# Altium PCB DoorController.PcbDoc
Units mm, origin at the board's own origin, x right, y up, seen from the top; angles counter-clockwise.
Board outline 108.71 x 68.07 mm, 2 copper layers (Top Layer, Bottom Layer); 80 components, 62 nets, 265 pads, 0 vias.
Unrouted connection lines stored in the file: 81.
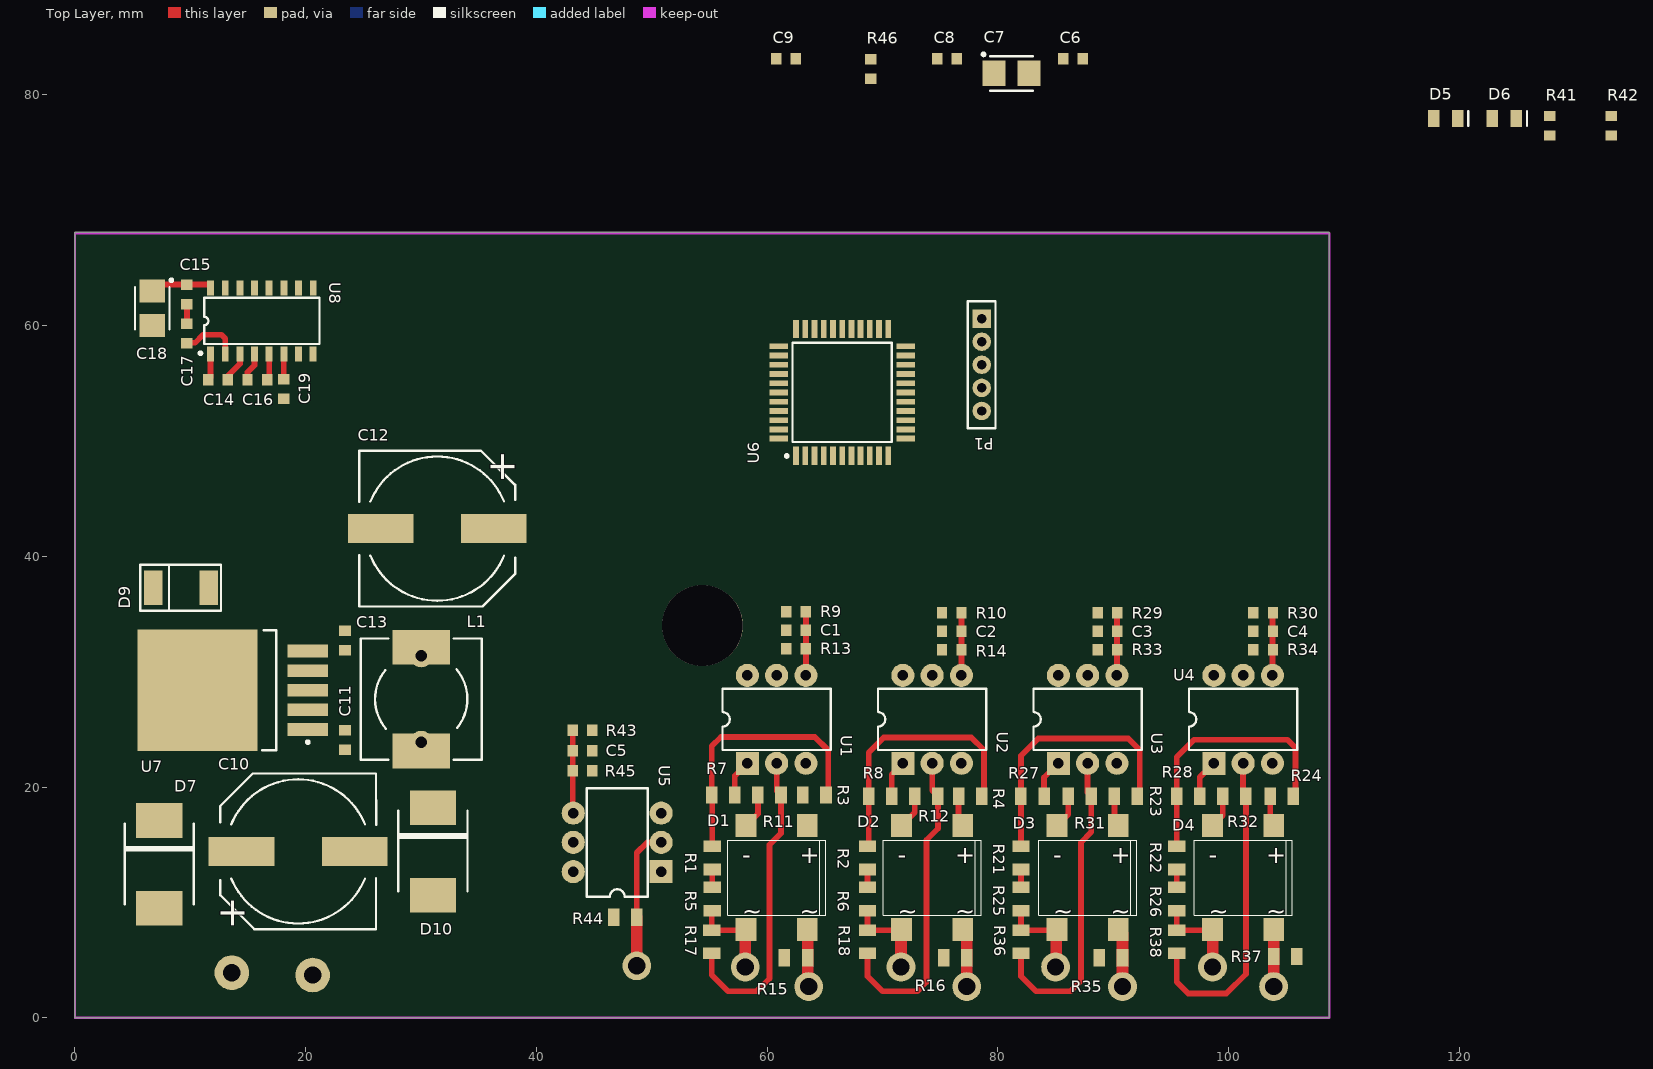
[diagram p0: Top Layer view]
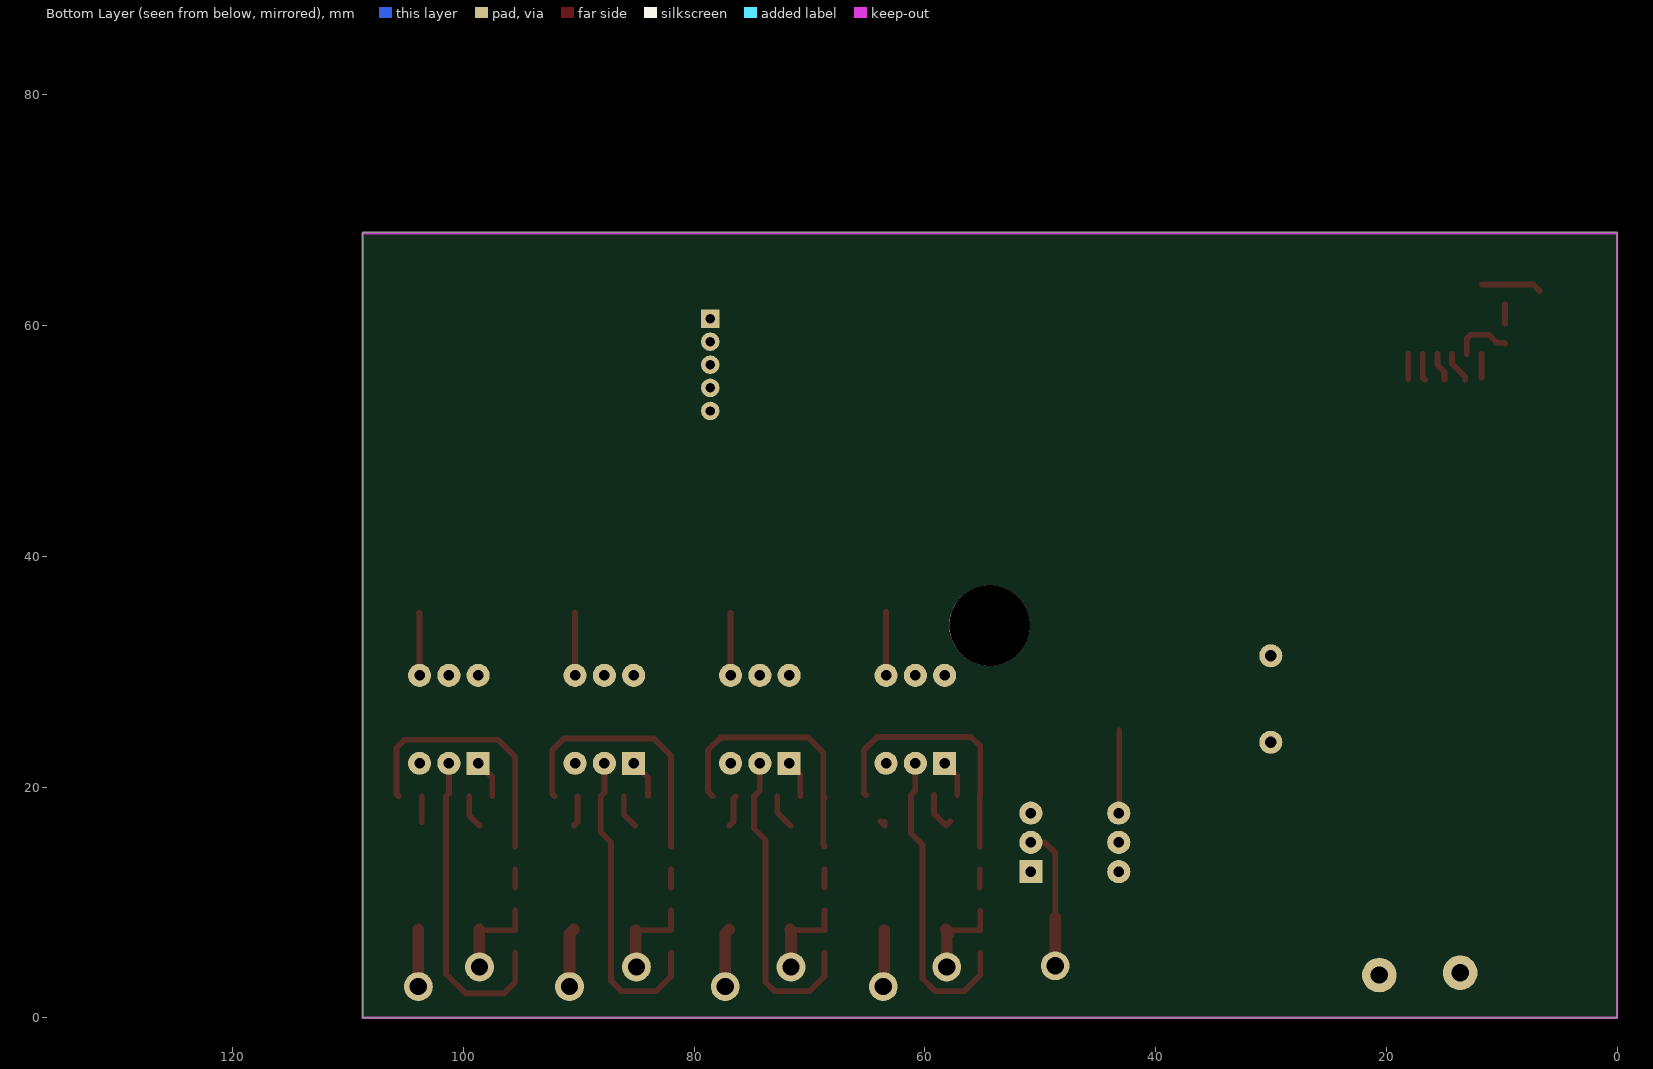
[diagram p1: Bottom Layer view, seen from below]

## Layer stack, top to bottom
Top Layer: signal copper 0.0356
Dielectric: dielectric 0.32, FR-4, Dk 4.8
Bottom Layer: signal copper 0.0356

## Board outline
0,0 108.712,0 108.712,68.072 0,68.072

## Design rules (kind name [scope] priority, off if disabled: settings)
Clearance [All] p1: gap=0.3
PolygonConnect [All] p1: connectstyle=Relief reliefconductorwidth=0.254 reliefentries=4 polygonreliefangle="90 Angle"
RoutingVias [All] p1: holewidth=0.6 width=0.8 viastyle="Through Hole" minholewidth=0.711 minwidth=1.27 maxholewidth=0.711 maxwidth=1.27
SilkscreenOverComponentPads [All] p1: minsilkscreentomaskgap=0.254
SolderMaskExpansion [All] p1: expansion=0.102
TestPointUsage [All] p1: valid=0 allowmultiple=FALSE
Testpoint [All] p1: side=15 testpointundercomponent=TRUE minsize=1.016 maxsize=2.54 preferedsize=1.524 minholesize=0 maxholesize=1.016 preferedholesize=0.813 testpointgrid=0.025 style=1023 order=0123456789
Width [All] p1: maxlimit=1.5 minlimit=0.3 preferedwidth=0.4
23 further rules are at their usual default settings.

## Classes and differential pairs
component class USART: C14 C15 C16 C17 C18 C19 U8
component class POWER: C10 C11 C12 C13 D7 D9 D10 L1 U7
component class Main: C6 C7 C8 C9 P1 R46 U6
component class IO: C1 C2 C3 C4 C5 D1 D2 D3 D4 D5 D6 R1 R2 R3 R4 R5 R6 R7 R8 R9 R10 R11 R12 R13 R14 R15 R16 R17 R18 R21 R22 R23 R24 R25 R26 R27 R28 R29 R30 R31 R32 R33 R34 R35 R36 R37 R38 R41 R42 R43 R44 R45 U1 U2 U3 U4 U5

## Components (designator, comment, footprint, x,y, rotation, side; value= is the part's Value field where it differs from the comment)
C1 "Cap" 3-0603_L 62.5,33.6 r180 top
C2 "Cap" 3-0603_L 76,33.5 r180 top
C3 "Cap" 3-0603_L 89.5,33.5 r180 top
C4 "Cap" 3-0603_L 103,33.5 r180 top
C5 "Cap" 3-0603_L 44,23.15 r0 top
C6 "Cap" 3-0603_L 86.515,83.127 r0 top
C7 "CAP-Tantal" 3528 81.181,81.857 r0 top
C8 "Cap" 3-0603_L 75.593,83.127 r0 top
C9 "Cap" 3-0603_L 61.623,83.127 r0 top
C10 "Cap Pol1" "CAP Size H13= 12.5x13.8mm" 19.342,14.417 r90 top
C11 "Cap" 3-0603_L 23.406,24.069 r90 top
C12 "Cap Pol1" "CAP Size H13= 12.5x13.8mm" 31.4,42.4 r270 top
C13 "Cap" 3-0603_L 23.406,32.705 r90 top
C14 "Cap" 3-0603_L 12.4,55.3 r0 top
C15 "Cap" 3-0603_L 9.7,62.7 r90 top
C16 "Cap" 3-0603_L 15.8,55.3 r0 top
C17 "Cap" 3-0603_L 9.7,59.3 r270 top
C18 "CAP-Tantal" 3528 6.7,61.5 r270 top
C19 "Cap" 3-0603_L 18.1,54.5 r90 top
D1 "DI1010S" DF-S 60.821,12.149 r0 top
D2 "DI1010S" DF-S 74.3,12.149 r0 top
D3 "DI1010S" DF-S 87.779,12.149 r0 top
D4 "DI1010S" DF-S 101.258,12.149 r0 top
D5 "LED Kırmızı" "6-0805 - LED" 118.816,77.955 r0 top
D6 "LED Yesil" "6-0805 - LED" 123.896,77.955 r0 top
D7 "MBRS340T3G" "CASE 403-03 ISSUE E" 7.3,13.3 r90 top
D9 "TVS SMAJ48CA" "DO214 AA" 9.182,37.277 r180 top
D10 "MBRS340T3G" "CASE 403-03 ISSUE E" 31.026,14.417 r90 top
L1 "Inductor" EB-221M18G01 30.01,27.625 r180 top
P1 "Header 2mm 5pin" "Header 2mm 5Pin" 78.6,60.6 r270 top
R1 "Res1" 6-0805_M 55.233,13.849 r270 top
R2 "Res1" 6-0805_M 68.7,13.849 r270 top
R3 "Res1" 6-0805_M 64.1,19.3 r180 top
R4 "Res1" 6-0805_M 77.6,19.2 r180 top
R5 "Res1" 6-0805_M 55.233,10.293 r90 top
R6 "Res1" 6-0805_M 68.7,10.293 r90 top
R7 "Res1" 6-0805_M 56.2,19.3 r0 top
R8 "Res1" 6-0805_M 69.8,19.2 r0 top
R9 "Res1" 3-0603_L 62.5,35.2 r180 top
R10 "Res1" 3-0603_L 76,35.1 r180 top
R11 "Res1" 6-0805_M 60.2,19.3 r180 top
R12 "Res1" 6-0805_M 73.8,19.2 r180 top
R13 "Res1" 3-0603_L 62.5,32 r0 top
R14 "Res1" 3-0603_L 76,31.9 r0 top
R15 "Res1" 6-0805_M 62.5,5.2 r0 top
R16 "Res1" 6-0805_M 76.3,5.2 r0 top
R17 "Res1" 6-0805_M 55.2,6.6 r90 top
R18 "Res1" 6-0805_M 68.7,6.6 r90 top
R21 "Res1" 6-0805_M 82,13.849 r270 top
R22 "Res1" 6-0805_M 95.5,13.849 r270 top
R23 "Res1" 6-0805_M 91.1,19.2 r180 top
R24 "Res1" 6-0805_M 104.6,19.2 r180 top
R25 "Res1" 6-0805_M 82,10.293 r90 top
R26 "Res1" 6-0805_M 95.5,10.293 r90 top
R27 "Res1" 6-0805_M 83,19.2 r0 top
R28 "Res1" 6-0805_M 96.5,19.2 r0 top
R29 "Res1" 3-0603_L 89.5,35.1 r180 top
R30 "Res1" 3-0603_L 103,35.1 r180 top
R31 "Res1" 6-0805_M 87.1,19.2 r180 top
R32 "Res1" 6-0805_M 100.5,19.2 r180 top
R33 "Res1" 3-0603_L 89.5,31.9 r0 top
R34 "Res1" 3-0603_L 103,31.9 r0 top
R35 "Res1" 6-0805_M 89.8,5.2 r0 top
R36 "Res1" 6-0805_M 82,6.6 r90 top
R37 "Res1" 6-0805_M 104.9,5.3 r180 top
R38 "Res1" 6-0805_M 95.5,6.6 r90 top
R41 "Res1" 3-0603_L 127.833,77.32 r90 top
R42 "Res1" 3-0603_L 133.167,77.32 r90 top
R43 "Res1" 3-0603_L 44,24.9 r0 top
R44 "Res1" 6-0805_M 47.7,8.7 r0 top
R45 "Res1" 3-0603_L 44,21.4 r180 top
R46 "Res1" 3-0603_L 68.989,82.238 r90 top
U1 "4N25" DIP-6 60.821,25.865 r0 top
U2 "4N25" DIP-6 74.3,25.865 r0 top
U3 "4N25" DIP-6 87.779,25.865 r0 top
U4 "4N25" DIP-6 101.258,25.865 r0 top
U5 "4N25" DIP-6 47,15.2 r90 top
U6 "PIC16F887" TQFP-44 66.5,54.2 r90 top
U7 "LM2576S-5.0" TS5B_M 14.135,28.387 r180 top
U8 "MAX232ID" "SOIC16 - big" 16.2,60.4 r0 top

## Footprints (in the part's own frame and the unit in brackets; to place one, negate y for a bottom-side part, rotate by r counter-clockwise, add the part's x,y. Pads: shape width x height; smd on the part's side, far side on the other; paste and mask are expansions set on the pad)
3-0603_L [mm] "Chip Resistor; Body 1.6 x 0.9 mm (LxW typ)"
  rect 0.9x1 smd: 1(-0.85,0) 2(0.85,0)
  body extent -0.81,-0.41 0.81,0.41, height 0.46
"6-0805 - LED" [mm] "Chip LED"
  rect 1x1.5 smd: 1(-1.05,0) 2(1.05,0)
  silkscreen extent 1.96,-0.64 1.96,0.62, body extent -1.03,-0.45 1.03,0.46, height 0.85
6-0805_M [mm] "Chip Resistor; Body 2 x 1.2 mm (LxW typ)"
  rect 1x1.5 smd: 1(-1,0) 2(1,0)
  body extent -1.01,-0.63 1.01,0.64, height 0.61
3528 [mm] "Capacitor, SM Tantalum; Body 3.5 x 2.8 mm (LxW typ)"
  rect 2x2.2 smd: 1(-1.5,0) 2(1.5,0)
  silkscreen extent -2.55,-1.5 1.85,1.77, body extent -2.5,-1.5 2.5,1.5, height 2.11
"CAP Size H13= 12.5x13.8mm" [mm]
  rect 2.5x5.7 smd: 1(0,4.9) 2(0,-4.9)
  silkscreen extent -6.75,-6.76 6.75,6.75, body extent -6.75,-6.76 6.75,7.04, height 13.5
"CASE 403-03 ISSUE E" [mm] "CASE 403-03 ISSUE E"
  rect 3x4 smd: 1(-3.8,0) 2(3.8,0)
  silkscreen extent -3.48,-3 3.53,3, body extent -4.06,-3.14 4.06,3.16, height 2.67
DF-S [mm]
  rect 1.8x2 smd: 1(-2.65,4.5) 2(-2.65,-4.5) 3(2.65,4.5) 4(2.65,-4.5)
  silkscreen extent -4.25,-3.25 4.25,3.25, body extent -4.24,-5.02 4.26,4.98, height 3.63
DIP-6 [mm] "DIP; 6 Leads; Row Spacing 7.62 mm; Pitch 2.54 mm"
  rect 2x2 hole 0.9: 1(-2.54,-3.81)
  round 2 hole 0.9 unplated: 2(0,-3.81) 3(2.54,-3.81) 4(2.54,3.81) 5(0,3.81)
  round 2 hole 0.9: 6(-2.54,3.81)
  silkscreen extent -4.7,-2.65 4.7,2.65
"DO214 AA" [mm] "DO-214-AA/SMB; 2 C-Bend Leads; Body 5.6 x 3.9 mm, inc. leads (LxW)"
  rect 1.6x3 smd: 1(-2.4,0) 2(2.4,0)
  silkscreen extent -3.48,-2 3.53,2, body extent -2.76,-1.95 2.82,2, height 2.65
EB-221M18G01 [mm]
  rect 5x3 smd: 1(0,4.5) 2(0,-4.5)
  round 2 hole 1: 1(0,3.75) 2(0,-3.75)
  silkscreen extent -5.25,-5.25 5.25,5.25, body extent -5,-5.02 5,4.98, height 4.7
"Header 2mm 5Pin" [mm] "10 pin header"
  rect 1.6x1.6 hole 0.8: 1(0,0)
  round 1.6 hole 0.8: 2(2,0) 3(4,0) 4(6,0) 5(8,0)
  silkscreen extent -1.5,-1.2 9.5,1.2
"SOIC16 - big" [mm]
  rect 0.6x1.3 smd: 1(-4.445,-2.875) 2(-3.175,-2.875) 3(-1.905,-2.875) 4(-0.635,-2.875) 5(0.635,-2.875) 6(1.905,-2.875) 7(3.175,-2.875) 8(4.445,-2.875) 9(4.45,2.875) 10(3.175,2.875) 11(1.905,2.875) 12(0.635,2.875) 13(-0.635,2.875) 14(-1.905,2.875) 15(-3.175,2.875) 16(-4.445,2.875)
  silkscreen extent -5.45,-2.92 5,2, body extent -5,-2.95 4.98,2.95, height 1.45
TQFP-44 [mm]
  rect 1.6x0.5 smd: 1(-5.5,4) 2(-5.5,3.2) 3(-5.5,2.4) 4(-5.5,1.6) 5(-5.5,0.8) 6(-5.5,0) 7(-5.5,-0.8) 8(-5.5,-1.6) 9(-5.5,-2.4) 10(-5.5,-3.2) 11(-5.5,-4) 23(5.5,-4) 24(5.5,-3.2) 25(5.5,-2.4) 26(5.5,-1.6) 27(5.5,-0.8) 28(5.5,0) 29(5.5,0.8) 30(5.5,1.6) 31(5.5,2.4) 32(5.5,3.2) 33(5.5,4)
  rect 0.5x1.6 smd: 12(-4,-5.5) 13(-3.2,-5.5) 14(-2.4,-5.5) 15(-1.6,-5.5) 16(-0.8,-5.5) 17(0,-5.5) 18(0.8,-5.5) 19(1.6,-5.5) 20(2.4,-5.5) 21(3.2,-5.5) 22(4,-5.5) 34(4,5.5) 35(3.2,5.5) 36(2.4,5.5) 37(1.6,5.5) 38(0.8,5.5) 39(0,5.5) 40(-0.8,5.5) 41(-1.6,5.5) 42(-2.4,5.5) 43(-3.2,5.5) 44(-4,5.5)
  silkscreen extent -5.62,-4.3 4.3,4.92, body extent -6,-6 6,6, height 1.1
TS5B_M [mm] "D2-PAK, 6-Leads, Body 8.6x10.2mm, Pitch 1.7mm, Lead Span 14.1mm, IPC Low Density"
  rect 3.5x1.1 smd: 1(-6.05,3.4) 2(-6.05,1.7) 3(-6.05,0) 4(-6.05,-1.7) 5(-6.05,-3.4)
  rect 10.4x10.5 smd: 6(3.5,0)
  silkscreen extent -6.18,-5.2 -2.11,5.2, body extent -7.73,-5 7.94,5, height 4.78

## Part data
C1 C2 C3 C4 C5 C6 C8 C9 C11 C13 C14 C15 C16 C17 C19: "Capacitor"
C7 C18: "Tantamount Military, Surface Mount MIL-PRF-55365/8 Qualified Solid Tantalum Chip Capacitor: 6.8uF, 20% Tolerance, 6 WVDC @ +85°C, Surge = 8V"
C10 C12: "Polarized Capacitor (Radial)"
D1 D2 D3 D4: "Full Wave Diode Bridge"
D5 D6: library part LED, "Typical INFRARED GaAs LED"
D7 D10: "3 Amp Shotky Rectifier"
P1: "Header 2mm , 5-Pin"
R1 R2 R3 R4 R5 R6 R7 R8 R9 R10 R11 R12 R13 R14 R15 R16 R17 R18 R21 R22 R23 R24 R25 R26 R27 R28 R29 R30 R31 R32 R33 R34 R35 R36 R37 R38 R41 R42 R43 R44 R45 R46: "Resistor"
U6: "EPROM-Based 8-Bit CMOS Microcontroller"
U7: "SIMPLE SWITCHER; 3A Step-Down Voltage Regulator"
U8: "5V, Low-Power, up to 1Mbps, True RS-232 Transceiver Using Four 0.1µF External Capacitor"

## Free pads (board coordinates)
  round 7 hole 7: 0(54.38,34)
  round 3 hole 1.5: 1(13.6,3.9) 1(20.6,3.7)
  round 2.5 hole 1.5: 1(48.7,4.5) 1(58.1,4.4) 1(63.6,2.7) 1(71.6,4.4) 1(77.3,2.7) 1(85,4.4) 1(90.8,2.7) 1(98.6,4.4) 1(103.9,2.7)

## Nets (pads, with @x,y where several pads share a name; then routed paths per layer and width w, separated by ;. In a path a pad name is that pad's centre, name@x,y a point inside that pad or via, vN(x,y) a via of type N, cw(c..) or ccw(c..) an arc to the next point about the centre after c; other vN are vias at no path point)
"+24V INPUT": D7.1 D9.2 pad.1@20.6,3.7 R1.2 R2.2 R5.2 R6.2 R21.2 R22.2 R25.2 R26.2 | length 6.2
  Top Layer w0.5: R5.2 R1.2 ; R6.2 R2.2 ; R25.2 R21.2 ; R26.2 R22.2
GND: C1.2 C2.2 C3.2 C4.2 C5.2 C6.2 C7.2 C8.2 C9.2 C10.2 C11.1 C12.2 C13.1 C15.1 C17.1 C18.2 C19.1 D5.2 D6.2 D9.1 D10.1 P1.3 pad.1@13.6,3.9 R13.1 R14.1 R15.1 R16.1 R33.1 R34.1 R35.1 R37.1 R44.1 R45.1 U6.6 U6.29 U7.3 U7.5 U7.6 U8.15 | length 1.7
  Top Layer w0.5: C17.1 C15.1
NetC1_1: C1.1 R9.1 R13.2 U1.4 | length 5.5
  Top Layer w0.5: R9.1 63.361,35.189 63.361,33.6 U1.4
NetC2_1: C2.1 R10.1 R14.2 U2.4 | length 5.4
  Top Layer w0.5: U2.4 76.84,33.5 76.84,35.09 R10.1
NetC3_1: C3.1 R29.1 R33.2 U3.4 | length 5.4
  Top Layer w0.5: U3.4 90.319,33.5 90.319,35.069 R29.1
NetC4_1: C4.1 R30.1 R34.2 U4.4 | length 5.4
  Top Layer w0.5: U4.4 103.798,33.5 103.798,35.048 R30.1
NetC5_1: C5.1 R43.1 R45.2 U5.4 | length 7.2
  Top Layer w0.5: R43.1 C5.1 R45.2 43.15,17.78 U5.4
NetC9_1: C9.1 P1.1 R46.1 U6.18
NetC10_1: C10.1 C11.2 D7.2 U7.1
NetC14_1: C14.1 U8.1 | length 2
  Top Layer w0.5: C14.1@11.755,55.505 U8.1
NetC14_2: C14.2 U8.3 | length 2.7
  Top Layer w0.5: C14.2@13.15,55.3 13.15,55.55 14.295,56.695 U8.3
NetC16_1: C16.1 U8.4 | length 2.5
  Top Layer w0.5: C16.1 14.95,55.95 15.565,56.565 U8.4
NetC16_2: C16.2 U8.5 | length 2.3
  Top Layer w0.5: C16.2 16.835,55.485 U8.5
NetC17_2: C17.2 U8.2 | length 5.1
  Top Layer w0.5: C17.2 9.75,58.5 10.4,58.5 11.1,59.2 12.7,59.2 13.025,58.875 U8.2
NetC19_2: C19.2 U8.6 | length 2.2
  Top Layer w0.5: C19.2@18.105,55.355 U8.6
NetD1_1: D1.1 R11.2 | length 3.6
  Top Layer w0.5: D1.1@57.789,17.031 D1.1 59.2,17.678 R11.2
NetD1_2: D1.2 pad.1@58.1,4.4 R5.1 R17.2 | length 8.4
  Top Layer w0.5: R17.2 R5.1@55.2,9.26 ; R17.2@55.233,7.593 58.115,7.593 D1.2@57.7,7.178
  Top Layer w1: pad.1@58.1,4.4 58.1,7.578 D1.2
NetD1_3: D1.3 R3.2 | length 0.9
  Top Layer w0.5: D1.3@63.471,16.992 D1.3 D1.3@63.853,17.031
NetD1_4: D1.4 pad.1@63.6,2.7 R15.2 | length 5.1
  Top Layer w0.5: D1.4@63.377,7.555 D1.4 D1.4@63.527,7.593
  Top Layer w1: D1.4@63.527,7.593 63.527,2.773 pad.1@63.6,2.7
NetD2_1: D2.1 R12.2 | length 3
  Top Layer w0.5: D2.1 72.8,17.799 R12.2
NetD2_2: D2.2 pad.1@71.6,4.4 R6.1 R18.2 | length 7.9
  Top Layer w0.5: R18.2@68.7,7.593 D2.2@71.594,7.593 ; R18.2 R6.1
  Top Layer w1: pad.1@71.6,4.4 71.6,7.599 D2.2
NetD2_3: D2.3 R4.2 | length 2.8
  Top Layer w0.5: R4.2@76.4,19.2 76.59,19.01 76.59,17.009 D2.3
NetD2_4: D2.4 pad.1@77.3,2.7 R16.2 | length 7.3
  Top Layer w0.5: R16.2@77.3,5.1 D2.4@77.3,7.299
  Top Layer w1: D2.4 77.3,7.299 pad.1@77.3,2.7
NetD3_1: D3.1 R31.2 | length 3
  Top Layer w0.5: D3.1 86.1,17.62 R31.2
NetD3_2: D3.2 pad.1@85,4.4 R25.1 R36.2 | length 8
  Top Layer w0.5: R36.2@82,7.593 D3.2@85.073,7.593 ; R36.2 R25.1
  Top Layer w1: pad.1@85,4.4 85.073,4.473 D3.2@85.073,7.593
NetD3_3: D3.3 R23.2 | length 2.7
  Top Layer w0.5: R23.2 90.1,16.978 D3.3
NetD3_4: D3.4 pad.1@90.8,2.7 R35.2 | length 5.1
  Top Layer w1: D3.4 90.8,7.278 pad.1@90.8,2.7
NetD4_1: D4.1 R32.2 | length 2.9
  Top Layer w0.5: D4.1 99.5,17.541 R32.2
NetD4_2: D4.2 pad.1@98.6,4.4 R26.1 R38.2 | length 8
  Top Layer w0.5: R38.2@95.5,7.593 D4.2@98.552,7.593 ; R38.2 R26.1 ; pad.1@98.6,4.4 pad.1@98.608,4.408
  Top Layer w1: pad.1@98.608,4.408 D4.2
NetD4_3: D4.3 R24.2 | length 2.2
  Top Layer w0.5: D4.3@103.6,16.957 R24.2
NetD4_4: D4.4 pad.1@103.9,2.7 R37.2 | length 5
  Top Layer w1: pad.1@103.9,2.7 R37.2 103.9,7.641 D4.4
NetD5_1: D5.1 R41.1
NetD6_1: D6.1 R42.1
NetD10_2: D10.2 L1.1 U7.2
NetP1_4: P1.4 U6.17
NetP1_5: P1.5 U6.16
NetR1_1: R1.1 R3.1 R7.1 | length 25.1
  Top Layer w0.5: R7.1 55.2,23.546 55.995,24.341 64.123,24.341 ; R1.1 R7.1@55.233,19.3 ; R3.1 65.3,19.5 65.3,23.164 64.123,24.341 ; 65.2,23.264 64.123,24.341
NetR2_1: R2.1 R4.1 R8.1 | length 23.5
  Top Layer w0.5: R2.1 68.8,14.949 R8.1 ; R8.1@68.7,19.1 R8.1 ; R4.1@78.4,19.2 78.8,19.6 78.8,23.2 77.7,24.3 70.1,24.3 68.8,23 R8.1
NetR7_2: R7.2 U1.1 | length 3.2
  Top Layer w0.5: R7.2 57.2,20.974 U1.1
NetR8_2: R8.2 U2.1 | length 3.3
  Top Layer w0.5: R8.2 70.8,21.095 U2.1
NetR9_2: R9.2 U6.8
NetR10_2: R10.2 U6.9
NetR11_1: R11.1 R17.1 U1.2 | length 27.2
  Top Layer w0.5: R17.1 55.2,3.7 56.6,2.3 59.1,2.3 60.2,3.4 60.2,15 61.2,16 R11.1 60.821,19.679 U1.2
NetR12_1: R12.1 R18.1 U2.2 | length 27.5
  Top Layer w0.5: R18.1 68.7,3.6 70,2.3 73,2.3 73.8,3.1 73.8,15.4 74.8,16.4 R12.1 74.3,19.7 U2.2
NetR21_1: R21.1 R23.1 R27.1 | length 23.3
  Top Layer w0.5: R21.1 82,22.7 83.5,24.2 91.3,24.2 92.3,23.2 92.3,19.4 R23.1
NetR22_1: R22.1 R24.1 R28.1 | length 23.2
  Top Layer w0.5: R22.1 R28.1 95.5,22.6 97,24.1 105.1,24.1 105.8,23.4 105.8,19.4 R24.1
NetR27_2: R27.2 U3.1 | length 3.4
  Top Layer w0.5: R27.2 84,20.816 U3.1
NetR28_2: R28.2 U4.1 | length 3.4
  Top Layer w0.5: R28.2 97.5,20.837 U4.1
NetR29_2: R29.2 U6.10
NetR30_2: R30.2 U6.11
NetR31_1: R31.1 R36.1 U3.2 | length 28
  Top Layer w0.5: R36.1 82,3.6 83.3,2.3 86.3,2.3 87.2,3.2 87.2,6.9 ; 87.2,6.4 87.2,6.9 ; U3.2 87.779,19.521 R31.1 88.1,16.1 87.2,15.2 87.2,6.9
NetR32_1: R32.1 R38.1 U4.2 | length 28
  Top Layer w0.5: R38.1 95.5,3.1 96.5,2.1 99.8,2.1 101.5,3.8 R32.1 101.258,19.442 U4.2
NetR41_2: R41.2 U6.38
NetR42_2: R42.2 U6.39
NetR43_2: R43.2 U6.36
NetR44_2: pad.1@48.7,4.5 R44.2 U5.2 | length 12.2
  Top Layer w0.5: R44.2@48.7,8.8 48.7,14.3 49.6,15.2 U5.2
  Top Layer w1: pad.1@48.7,4.5 R44.2
NetU5_1: U5.1
NetU6_1: U6.1 U8.9
NetU6_44: U6.44 U8.10
NetU8_7: U8.7
NetU8_8: U8.8
VCC: C6.1 C7.1 C8.1 C12.1 C13.2 C15.2 C18.1 L1.2 P1.2 R46.2 U1.5 U2.5 U3.5 U4.5 U5.5 U6.7 U6.28 U7.4 U8.16 | length 5.2
  Top Layer w0.5: C18.1 7.25,63.55 C15.2 U8.16@11.7,63.55
pads on no net: U1.3 U1.6 U2.3 U2.6 U3.3 U3.6 U4.3 U4.6 U5.3 U5.6 U6.2 U6.3 U6.4 U6.5 U6.12 U6.13 U6.14 U6.15 U6.19 U6.20 U6.21 U6.22 U6.23 U6.24 U6.25 U6.26 U6.27 U6.30 U6.31 U6.32 U6.33 U6.34 U6.35 U6.37 U6.40 U6.41 U6.42 U6.43 U8.11 U8.12 U8.13 U8.14

## Keep-outs
Keep-Out Layer:
  lines w0.2: 0,0 0,68 108.75,68 108.75,0 0,0

## Text inside footprints (layer, text, board x,y; h text height)
C10: Top Overlay "+" at 14.702,7.612 h2.5 r90
C12: Top Overlay "+" at 36.04,49.205 h2.5 r270
D1: Top Overlay "~" at 62.821,8.499 h1.52; Top Overlay "~" at 57.821,8.499 h1.52; Top Overlay "-" at 57.821,13.399 h1.52; Top Overlay "+" at 62.821,13.399 h1.52
D2: Top Overlay "~" at 76.3,8.499 h1.52; Top Overlay "~" at 71.3,8.499 h1.52; Top Overlay "-" at 71.3,13.399 h1.52; Top Overlay "+" at 76.3,13.399 h1.52
D3: Top Overlay "~" at 89.779,8.499 h1.52; Top Overlay "~" at 84.779,8.499 h1.52; Top Overlay "-" at 84.779,13.399 h1.52; Top Overlay "+" at 89.779,13.399 h1.52
D4: Top Overlay "~" at 103.258,8.499 h1.52; Top Overlay "~" at 98.258,8.499 h1.52; Top Overlay "-" at 98.258,13.399 h1.52; Top Overlay "+" at 103.258,13.399 h1.52